# EAGLE board bike-blinky (EAGLE 6.4)
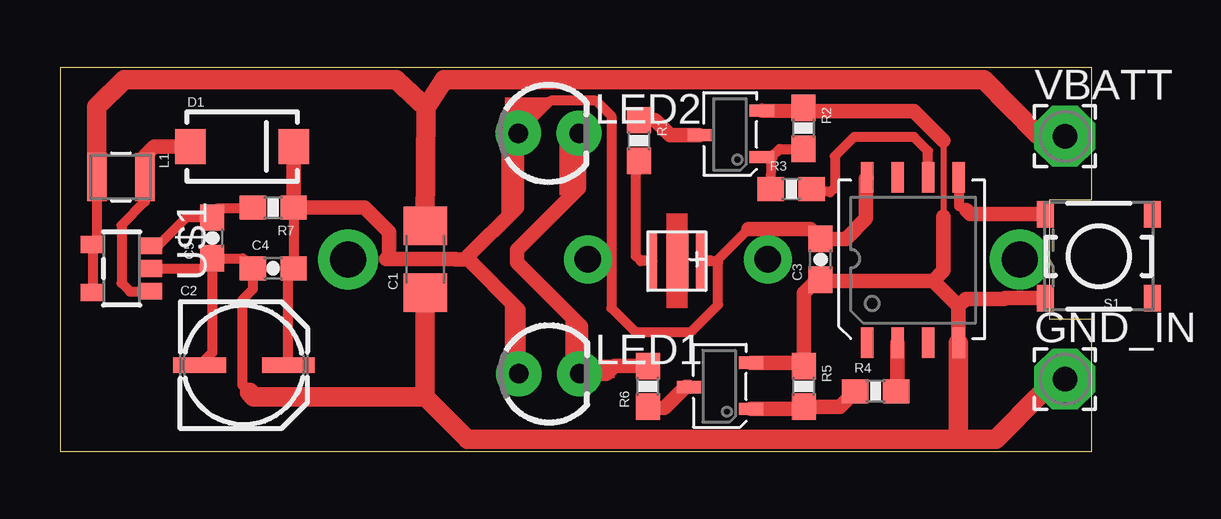
[diagram p0: board, top side]

Size 43.02 x 16.01 mm. Coordinates in mm from the lower left corner, seen from the top.
Outline: 43,16 43,10.5 41.26,10.5 41.26,5.5 43,5.5 43,0 0,0 0,16 43,16
Outline: 43,16 43.02,16.01
Copper layers (1*16): Top 0.035mm / dielectric 1.5mm / Bottom 0.035mm
Design rules "default": minimum track width 10mil, minimum drill 24mil, track to track 8mil, track to pad 8mil, pad to pad 8mil, via to via 8mil, smd to smd 8mil, copper to edge 40mil, drill to drill 8mil, minimum pad ring 10mil, minimum via ring 8mil, stop-mask expansion 4mil, vias tented up to drill 0mil, thermal gap 10mil

## Footprints (pad centres in the part's own frame; a part is rotated, then mirrored left to right if it is on the bottom)
1206 = smd 1.6 x 1.8: 1 -1.4,0; 2 1.4,0
PANASONIC_C = smd 2.2 x 0.65: + 1.9,-0.2; - -1.8,-0.2
0603-CAP = smd 1.1 x 1: 1 -0.85,0; 2 0.85,0
SMA-DIODE = smd 1.27 x 1.47: A -2.15,0; C 2.15,0
2,54/1,0 = drill 1.016 pad 2.54 octagon: 1 0,0
1007 = smd 2 x 0.8: 1 0,1; 2 0,-1
LED3MM = drill 0.813 pad 1.88: A -1.27,0; K 1.27,0
XB-D-REV1 = smd 0.36 x 2.34: A 0.935,-0.075; C -1.035,-0.08 | smd 0.92 x 2.34: THERMAL -0.015,-0.075
0603-RES = smd 1.1 x 1: 1 -0.85,0; 2 0.85,0
TACTILE_SWITCH_SMD-2 = smd 0.7 x 1.1: 1 2.225,1.75; 2 2.225,-1.75; 3 -2.225,-1.75; 4 -2.225,1.75
SOT23-5 = smd 0.7 x 1: 1 0.95,1.2; 2 0,1.2; 3 -0.95,1.2; 4 -1,-1.2; 5 1,-1.2
WSOIC-8 = smd 0.508 x 1.27: 1 -1.855,-3.486; 2 -0.585,-3.486; 3 0.685,-3.486; 4 1.955,-3.486; 5 1.955,3.413; 6 0.685,3.413; 7 -0.585,3.413; 8 -1.855,3.413
SOT-23-3 = smd 0.508 x 1.016: 1 -0.941,-1.312; 2 0.986,-1.312; 3 -0.03,1.282

## Placement (x,y rotation side)
C1  100uF (tantalum)  [1206]  15.23,8 90 top
C2  100uF  [PANASONIC_C]  7.62,3.78 0 top
C3  1uF  [0603-CAP]  31.7,8 90 top
C4  1uF  [0603-CAP]  8.89,7.62 0 top
C5  1uF  [0603-CAP]  6.35,8.89 90 top
D1  STPS2L40AF  [SMA-DIODE]  7.59,12.7 0 top
GND_IN  [2,54/1,0]  41.89,3 0 top
L1  10uH  [1007]  2.54,11.43 270 top
LED1  [LED3MM]  20.39,3.22 0 top
LED2  [LED3MM]  20.37,13.25 0 top
LED3  XP-D  [XB-D-REV1]  25.75,8 0 top
R1  3.9  [0603-RES]  24.13,12.95 270 top
R2  100K  [0603-RES]  30.99,13.46 270 top
R3  100  [0603-RES]  30.48,10.92 0 top
R4  100  [0603-RES]  34,2.5 0 top
R5  100K  [0603-RES]  31,2.7 270 top
R6  33  [0603-RES]  24.5,2.7 90 top
R7  10  [0603-RES]  8.89,10.16 180 top
S1  [TACTILE_SWITCH_SMD-2]  43.3,8.13 180 top
U$1  SP6641B  [SOT23-5]  2.57,7.61 270 top
U$2  ATTINY13  [WSOIC-8]  35.5,8 0 top
U$7  NDS351AN  [SOT-23-3]  27.5,2.7 90 top
U$8  NDS351AN  [SOT-23-3]  27.94,13.21 90 top
VBATT  [2,54/1,0]  41.89,13.13 0 top

## Library data of the parts
C1 C3-C5 R1-R6 = SparkFun
C2 = SparkFun-Capacitors
D1 = SparkFun-DiscreteSemi; PROD_ID: DIO-08053
GND_IN VBATT = wirepad
L1 R7 = SparkFun-Passives
LED1 LED2 = SparkFun-LED
LED3 = led_cree
S1 = SparkFun-Electromechanical
U$1 = Sipex Custom
U$2 U$7 U$8 = Synapseware

## Nets
5V: C2.+ C3.2 C4.2 D1.C LED1.A LED2.A LED3.A R7.1 U$2.8
GND: C1.1 C2.- C3.1 C4.1 C5.1 GND_IN.1 R2.1 R5.1 S1.1 U$1.2 U$2.4 U$7.2 U$8.2
GND_OUT: R1.1 U$8.3
GND_OUT1: R6.1 U$7.3
N$2: R3.2 U$2.6
N$3: D1.A L1.1 U$1.1
N$4: LED1.K LED2.K R6.2
N$5: LED3.C R1.2
N$6: R4.2 U$2.2
N$7: C5.2 R7.2 U$1.3
RED: R2.2 R3.1 U$8.1
SW: S1.2 U$2.5
VBATT: C1.2 L1.2 U$1.4 U$1.5 VBATT.1
YEL: R4.1 R5.2 U$7.1

## Tracks (layer width: path | path; a pad name or v marks a point on that pad's centre or on a via)
5V
  Top 0.406: 31.85,9 C3.2 | 16.5,8 | LED2.A 20.45,14.61 22.35,14.61 22.99,13.97 22.99,5.97 24,4.95 26.29,4.95 27.43,6.1 27.43,7.85 27.36,7.92 | LED3.A 27.36,7.92 | 27.36,7.92 28.7,9.27 | 9.54,10.36 R7.1 C4.2 9.52,7.4 C2.+
  Top 0.61: U$2.8 33.6,11.37 33.6,9.7 32.75,8.85 C3.2 31.28,9.27 28.7,9.27 | 16.5,8 16.89,8 16.95,8.06 | 13.59,8 13.72,8 | 13.72,8 16.5,8 | 16.95,8.06 19.05,10.16 19.05,13.2 LED2.A | LED1.A 19.12,5.89 16.95,8.06 | 13.72,8 13.72,9.14 12.7,10.16 R7.1 D1.C
GND
  Top 0.254: 36.83,12.95 36.83,9.78
  Top 0.406: U$1.2 5.92,7.62 C5.1 | C5.1 6.35,4.12 C2.- | C5.1 7.62,8.04 C4.1 8.04,6.75 7.59,6.3 7.59,2.74 7.9,2.44 8.23,2.11
  Top 0.61: U$2.4 37.45,6.04 | 37.45,6.04 36.4,7.1 | 36.4,7.1 31.5,7.1 | 31.5,7.1 31,6.6 R5.1 30.86,3.69 U$7.2 | C3.1 31.5,7.1 | U$8.2 30.84,14.19 | 30.84,14.19 R2.1 | S1.1 39.4,6.38 39.37,6.35 37.76,6.35 37.45,6.04 | 30.84,14.19 35.6,14.19 36.83,12.95 | 36.83,9.78 36.83,7.53 36.4,7.1
  Top 0.813: GND_IN.1 40.87,2.37 39,0.5 37.3,0.5 | 37.3,0.5 16.98,0.5 15.23,2.25 | U$2.4 37.45,0.55 37.3,0.5 | C1.1 15.23,2.25 | 15.23,2.25 8.08,2.25 7.9,2.44
GND_OUT
  Top 0.61: U$8.3 25.43,13.17 24.8,13.8 24.05,13.8 R1.1
GND_OUT1
  Top 0.61: U$7.3 26.07,2.67 25.2,1.8 24.55,1.8 R6.1
N$1  (via drill 1.5 pad 2.5)
  other vias: 40,8
N$2
  Top 0.406: U$2.6 36.19,12.52 35.6,13.1 33.1,13.1 32.3,12.3 32.3,11 32.1,10.8 R3.2
N$3
  Top 0.406: L1.1 3.54,10.4 2.56,9.42 2.56,7.01 2.92,6.66 3.76,6.66 U$1.1
  Top 0.61: D1.A 3.94,12.7 3.56,12.32 3.56,11.45 L1.1
N$4
  Top 0.61: R6.2 23.11,3.56 22.78,3.22 LED1.K | 21.59,3.3 LED1.K | LED2.K 21.64,10.97 19.05,8.38 19.05,7.87 21.72,5.21 21.72,3.28 LED1.K
N$5
  Top 0.406: LED3.C 24.21,7.92 24,8.13 24,12.15
  Top 0.61: 24,12.15 R1.2
N$6
  Top 0.61: U$2.2 34.91,2.46 R4.2
N$7
  Top 0.406: U$1.3 4.09,8.56 5.28,9.75 6.34,9.75 C5.2 6.35,9.91 6.58,10.13 8.02,10.13 R7.2
N$9  (via drill 1.1 pad 2)
  other vias: 29.5,8
N$10  (via drill 1.1 pad 2)
  other vias: 22,8
N$11  (via drill 1.5 pad 2.5)
  other vias: 12,8
RED
  Top 0.406: U$8.1 29.7,12.26 | R3.1 29.65,12.21 29.7,12.26 | 29.7,12.26 29.7,12.3 30,12.6 30.95,12.6 R2.2
SW
  Top 0.406: 37.77,10.05 37.48,10.21 37.48,11.38 U$2.5
  Top 0.61: S1.2 37.95,9.88 37.77,10.05
VBATT
  Top 0.406: L1.2 1.54,8.79 U$1.4 U$1.5
  Top 0.813: VBATT.1 40.77,13.21 38.5,15.5 16,15.5 15.25,14.32 | 15.25,14.32 C1.2 | 15.25,14.32 14.01,15.49 2.67,15.49 1.54,14.37 L1.2
YEL
  Top 0.61: R4.1 32.5,1.85 R5.2 30.91,1.76 U$7.1
(copper drawn outside any net)
  shapes: Top area x11